# Altium PCB LKS_Motor_0406.PcbDoc (part 3 of 4)
Units mm, origin at the board's own origin, x right, y up, seen from the top; angles counter-clockwise.
Board outline 117 x 10 mm, 2 copper layers (Top Layer, Bottom Layer); 114 components, 77 nets, 340 pads, 169 vias.
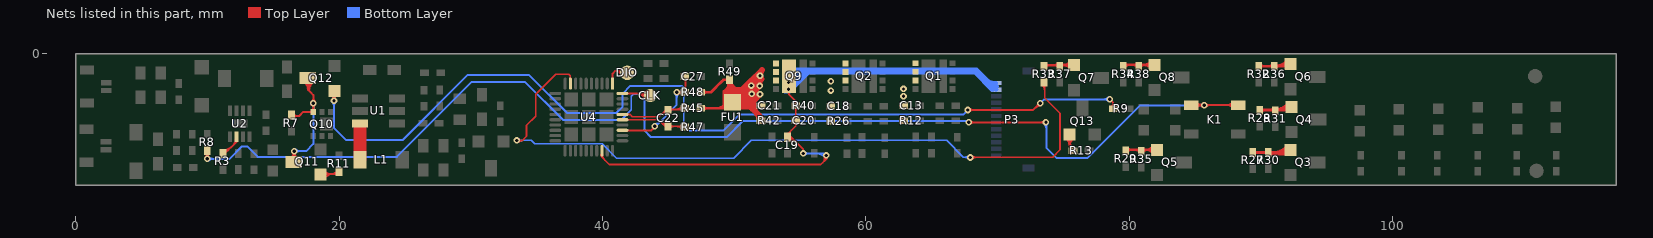
[diagram p3: the nets of this part, all layers, seen from the top]

## Via types
v1: diameter 0.5, hole 0.25, Top Layer to Bottom Layer, 167 vias
v2: diameter 0.7, hole 0.4, Top Layer to Bottom Layer, 2 vias

## Nets (pads, with @x,y where several pads share a name; then routed paths per layer and width w, separated by ;. In a path a pad name is that pad's centre, name@x,y a point inside that pad or via, vN(x,y) a via of type N, cw(c..) or ccw(c..) an arc to the next point about the centre after c; other vN are vias at no path point) (continued)
NetK1_1: K1.1 R8.1 | length 109.1
  Top Layer w0.15: v1(9.982,-7.976) R8.1@9.982,-7.341 ; v1(67.818,-5.207) v1(73.685,-5.207) ; K1.1@84.725,-3.9 K1.1@88.275,-3.9 ; v1@9.982,-7.849 cw(c10.414,-7.849) 10.109,-7.543 ccw(c10.414,-7.849) v1@9.982,-7.849 ; v1@9.982,-7.849 ccw(c9.55,-7.849) 9.856,-7.543 cw(c9.55,-7.849) v1@9.982,-7.849 ; R8.1@9.982,-7.553 cw(c9.56,-7.553) 9.858,-7.852 ccw(c9.56,-7.553) R8.1@9.982,-7.553 ; R8.1@9.982,-7.553 ccw(c10.405,-7.553) 10.106,-7.852 cw(c10.405,-7.553) R8.1@9.982,-7.553 ; 68.24,-5.207 cw(c68.24,-4.785) 67.942,-5.083 ccw(c68.24,-4.785) 68.24,-5.207 ; 68.24,-5.207 ccw(c68.24,-5.629) 67.942,-5.331 cw(c68.24,-5.629) 68.24,-5.207 ; 73.263,-5.207 cw(c73.263,-5.629) 73.562,-5.331 ccw(c73.263,-5.629) 73.263,-5.207 ; 73.263,-5.207 ccw(c73.263,-4.785) 73.562,-5.083 cw(c73.263,-4.785) 73.263,-5.207 ; v1@85.589,-3.9 cw(c85.589,-3.236) 85.12,-3.706 ccw(c85.589,-3.236) v1@85.589,-3.9 ; v1@85.589,-3.9 ccw(c85.589,-4.564) 85.12,-4.095 cw(c85.589,-4.564) v1@85.589,-3.9 ; 87.411,-3.9 cw(c87.411,-4.564) 87.88,-4.095 ccw(c87.411,-4.564) 87.411,-3.9 ; 87.411,-3.9 ccw(c87.411,-3.236) 87.88,-3.706 cw(c87.411,-3.236) 87.411,-3.9 ; K1.1@85.249,-3.9 cw(c85.249,-4.362) 85.576,-4.035 ccw(c85.249,-4.362) K1.1@85.249,-3.9 ; 85.305,-3.9 ccw(c85.305,-3.517) 85.576,-3.788 cw(c85.305,-3.517) 85.305,-3.9 ; v1@85.823,-4.035 cw(c86.15,-4.362) 86.15,-3.9 ccw(c86.15,-4.362) v1@85.823,-4.035 ; v1@85.823,-3.788 ccw(c86.094,-3.517) 86.094,-3.9 cw(c86.094,-3.517) v1@85.823,-3.788
  Bottom Layer w0.15: v1(9.982,-7.976) 11.684,-7.976 12.624,-7.036 13.03,-7.036 13.818,-7.823 24.384,-7.823 30.074,-2.134 34.112,-2.134 37.008,-5.029 41.427,-5.029 42.189,-4.267 42.189,-3.226 42.342,-3.073 43.053,-3.073 43.205,-3.226 43.205,-5.842 ; 43.205,-5.791 43.205,-5.842 ; v1(67.818,-5.207) 67.716,-5.105 50.648,-5.105 49.428,-6.325 43.688,-6.325 43.205,-5.842 ; v1(73.685,-5.207) 73.736,-5.258 73.711,-5.283 73.711,-7.137 74.473,-7.899 76.86,-7.899 80.848,-3.912 v1(85.7,-3.912) ; 10.405,-7.976 cw(c10.405,-7.553) 10.106,-7.852 ccw(c10.405,-7.553) 10.405,-7.976 ; 10.405,-7.976 ccw(c10.405,-8.398) 10.106,-8.099 cw(c10.405,-8.398) 10.405,-7.976 ; 85.277,-3.912 cw(c85.277,-4.334) 85.576,-4.035 ccw(c85.277,-4.334) 85.277,-3.912 ; 85.277,-3.912 ccw(c85.277,-3.489) 85.576,-3.788 cw(c85.277,-3.489) 85.277,-3.912 ; v1@73.562,-5.331 cw(c73.202,-5.691) 73.711,-5.691 ccw(c73.202,-5.691) v1@73.562,-5.331 ; 73.711,-5.568 cw(c74.047,-5.568) 73.809,-5.331 ccw(c74.047,-5.568) 73.711,-5.568
NetL1_1: L1.1 U1.6 | length 30.7
  Top Layer w0.3: L1.1@21.257,-7.998 U1.6@21.257,-5.319 ; U1.6@21.511,-5.293 21.511,-7.972 L1.1@21.59,-8.052 ; L1.1@21.765,-7.947 U1.6@21.765,-5.268 ; L1.1@21.917,-8.074 U1.6@21.917,-5.395 ; L1.1@21.343,-7.654 ccw(c19.956,-6.267) 21.917,-6.267 cw(c19.956,-6.267) L1.1@21.343,-7.654 ; L1.1@21.343,-7.654 ccw(c20.324,-6.635) 21.765,-6.635 cw(c20.324,-6.635) L1.1@21.343,-7.654 ; L1.1@21.343,-7.654 ccw(c20.937,-7.249) 21.511,-7.249 cw(c20.937,-7.249) L1.1@21.343,-7.654 ; L1.1@21.555,-7.866 ccw(c20.68,-6.992) 21.917,-6.992 cw(c20.68,-6.992) L1.1@21.555,-7.866 ; L1.1@21.555,-7.866 ccw(c21.048,-7.36) 21.765,-7.36 cw(c21.048,-7.36) L1.1@21.555,-7.866 ; L1.1@21.838,-7.654 cw(c23.24,-6.252) 21.257,-6.252 ccw(c23.24,-6.252) L1.1@21.838,-7.654 ; L1.1@21.838,-7.654 cw(c22.627,-6.865) 21.511,-6.865 ccw(c22.627,-6.865) L1.1@21.838,-7.654 ; 21.257,-6.976 ccw(c22.516,-6.976) 21.626,-7.866 cw(c22.516,-6.976) 21.257,-6.976 ; 21.257,-5.728 cw(c21.722,-5.728) 21.393,-5.399 ccw(c21.722,-5.728) 21.257,-5.728 ; 21.511,-5.839 cw(c22.133,-5.839) 21.693,-5.399 ccw(c22.133,-5.839) 21.511,-5.839 ; 21.765,-5.951 cw(c22.544,-5.951) 21.993,-5.399 ccw(c22.544,-5.951) 21.765,-5.951 ; U1.6@21.781,-5.399 cw(c21.452,-5.728) 21.917,-5.728 ccw(c21.452,-5.728) U1.6@21.781,-5.399
NetQ3_1: Q3.1 R27.1 R30.1 | length 21.6
  Top Layer w0.2: R27.1@89.383,-7.493 R30.1@90.576,-7.493 91.77,-7.493 ; R30.1@90.602,-7.62 91.237,-7.62 ; Q3.1@91.872,-7.391 91.745,-7.391 ; Q3.1@91.923,-7.62 91.237,-7.62 ; 89.754,-7.493 cw(c89.754,-7.121) 89.491,-7.384 ccw(c89.754,-7.121) 89.754,-7.493 ; 89.754,-7.493 ccw(c89.754,-7.865) 89.491,-7.602 cw(c89.754,-7.865) 89.754,-7.493 ; 90.205,-7.493 cw(c90.205,-7.865) 90.468,-7.602 ccw(c90.205,-7.865) 90.205,-7.493 ; 90.205,-7.493 ccw(c90.205,-7.121) 90.468,-7.384 cw(c90.205,-7.121) 90.205,-7.493 ; 90.948,-7.493 cw(c90.948,-7.121) 90.685,-7.384 ccw(c90.948,-7.121) 90.948,-7.493 ; 90.948,-7.493 ccw(c90.948,-7.865) 90.685,-7.602 cw(c90.948,-7.865) 90.948,-7.493 ; 91.237,-7.62 ccw(c91.237,-6.883) 91.921,-7.157 cw(c91.237,-6.883) 91.237,-7.62 ; 91.237,-7.62 91.465,-7.391 ; 91.465,-7.391 ccw(c91.465,-6.844) 91.942,-7.114 cw(c91.465,-6.844) 91.465,-7.391 ; 91.465,-7.391 91.745,-7.391 ; 91.745,-7.391 cw(c91.745,-7.667) Q3.1@91.966,-7.503 ; 91.745,-7.391 ccw(c91.745,-7.238) Q3.1@91.897,-7.254 ; 91.745,-7.391 cw(c91.745,-7.667) Q3.1@91.966,-7.503 ; 91.745,-7.391 ccw(c91.745,-7.238) Q3.1@91.897,-7.254 ; 91.745,-7.391 cw(c91.745,-7.667) Q3.1@91.966,-7.503 ; 91.745,-7.391 ccw(c91.745,-7.238) Q3.1@91.897,-7.254 ; 91.745,-7.391 cw(c91.745,-7.667) Q3.1@91.966,-7.503 ; 91.745,-7.391 ccw(c91.745,-7.238) Q3.1@91.897,-7.254 ; R30.1@90.685,-7.678 cw(c90.826,-7.818) 90.826,-7.62 ccw(c90.826,-7.818) R30.1@90.685,-7.678 ; R30.1@90.685,-7.46 ccw(c91.071,-7.075) 91.071,-7.62 cw(c91.071,-7.075) R30.1@90.685,-7.46 ; 90.9,-7.493 ccw(c90.9,-5.937) 92,-7.037 cw(c90.9,-5.937) 90.9,-7.493 ; 91.383,-7.493 ccw(c91.383,-6.42) 92.142,-7.179 cw(c91.383,-6.42) 91.383,-7.493 ; 91.532,-7.62 ccw(c91.532,-7.001) 92.107,-7.231 cw(c91.532,-7.001) 91.532,-7.62 ; 91.636,-7.391 cw(c91.636,-7.907) 92,-7.542 ccw(c91.636,-7.907) 91.636,-7.391 ; Q3.1@91.828,-7.62 ccw(c91.828,-7.12) 92.293,-7.306 cw(c91.828,-7.12) Q3.1@91.828,-7.62
NetQ4_1: Q4.1 R28.1 R31.1 | length 11.3
  Top Layer w0.2: R28.1@89.84,-4.267 Q4.1@92.151,-4.267 ; R28.1@90.025,-4.401 cw(c90.349,-4.726) 90.349,-4.267 ccw(c90.349,-4.726) R28.1@90.025,-4.401 ; R28.1@90.025,-4.184 ccw(c90.226,-3.982) 90.226,-4.267 cw(c90.226,-3.982) R28.1@90.025,-4.184 ; 90.677,-4.267 ccw(c90.677,-3.809) 91.001,-4.133 cw(c90.677,-3.809) 90.677,-4.267 ; 90.799,-4.267 cw(c90.799,-4.552) 91.001,-4.351 ccw(c90.799,-4.552) 90.799,-4.267 ; R31.1@90.915,-4.267 ccw(c90.915,-2.624) 92.076,-3.786 cw(c90.915,-2.624) R31.1@90.915,-4.267 ; R31.1@91.219,-4.351 cw(c91.42,-4.552) 91.42,-4.267 ccw(c91.42,-4.552) R31.1@91.219,-4.351 ; R31.1@91.219,-4.133 ccw(c91.543,-3.809) 91.543,-4.267 cw(c91.543,-3.809) R31.1@91.219,-4.133 ; 91.398,-4.267 ccw(c91.398,-3.107) 92.218,-3.927 cw(c91.398,-3.107) 91.398,-4.267 ; Q4.1@91.88,-4.267 ccw(c91.88,-3.59) 92.359,-4.069 cw(c91.88,-3.59) Q4.1@91.88,-4.267
NetQ5_1: Q5.1 R29.1 R35.1 | length 8.6
  Top Layer w0.2: R29.1@79.731,-7.366 79.807,-7.29 Q5.1@82.118,-7.29 ; 80.128,-7.29 cw(c80.128,-6.918) 79.865,-7.181 ccw(c80.128,-6.918) 80.128,-7.29 ; 80.128,-7.29 ccw(c80.128,-7.662) 79.865,-7.399 cw(c80.128,-7.662) 80.128,-7.29 ; 81.256,-7.29 cw(c81.256,-8.152) 81.866,-7.542 ccw(c81.256,-8.152) 81.256,-7.29 ; 81.256,-7.29 ccw(c81.256,-6.427) 81.866,-7.037 cw(c81.256,-6.427) 81.256,-7.29 ; 80.491,-7.29 cw(c80.491,-7.748) 80.816,-7.424 ccw(c80.491,-7.748) 80.491,-7.29 ; 80.614,-7.29 ccw(c80.614,-7.005) 80.816,-7.206 cw(c80.614,-7.005) 80.614,-7.29 ; R35.1@81.033,-7.424 cw(c81.358,-7.748) 81.358,-7.29 ccw(c81.358,-7.748) R35.1@81.033,-7.424 ; R35.1@81.033,-7.206 ccw(c81.235,-7.005) 81.235,-7.29 cw(c81.235,-7.005) R35.1@81.033,-7.206
NetQ6_1: Q6.1 R32.1 R36.1 | length 10.1
  Top Layer w0.2: R32.1@89.84,-0.94 R36.1@91.034,-0.94 ; Q6.1@92.253,-0.787 92.1,-0.94 R36.1@91.034,-0.94 ; 90.212,-0.94 cw(c90.212,-0.568) 89.949,-0.831 ccw(c90.212,-0.568) 90.212,-0.94 ; 90.212,-0.94 ccw(c90.212,-1.312) 89.949,-1.049 cw(c90.212,-1.312) 90.212,-0.94 ; 90.662,-0.94 cw(c90.662,-1.312) 90.925,-1.049 ccw(c90.662,-1.312) 90.662,-0.94 ; 90.662,-0.94 ccw(c90.662,-0.568) 90.925,-0.831 cw(c90.662,-0.568) 90.662,-0.94 ; R36.1@91.034,-0.94 ccw(c91.034,0.416) 91.999,-0.536 cw(c91.034,0.416) R36.1@91.034,-0.94 ; 91.405,-0.94 cw(c91.405,-0.568) 91.142,-0.831 ccw(c91.405,-0.568) 91.405,-0.94 ; 91.405,-0.94 ccw(c91.405,-1.312) 91.142,-1.049 cw(c91.405,-1.312) 91.405,-0.94 ; 91.512,-0.94 ccw(c91.512,-0.056) 92.141,-0.677 cw(c91.512,-0.056) 91.512,-0.94 ; 91.758,-0.94 cw(c91.758,-1.282) 92,-1.04 ccw(c91.758,-1.282) 91.758,-0.94
NetQ7_1: Q7.1 R33.1 R37.1 | length 8.7
  Top Layer w0.2: R33.1@73.558,-0.94 73.635,-0.864 Q7.1@75.997,-0.864 ; 73.905,-0.864 cw(c73.905,-0.492) 73.642,-0.755 ccw(c73.905,-0.492) 73.905,-0.864 ; 73.905,-0.864 ccw(c73.905,-1.235) 73.642,-0.972 cw(c73.905,-1.235) 73.905,-0.864 ; 74.355,-0.864 cw(c74.355,-1.235) 74.618,-0.972 ccw(c74.355,-1.235) 74.355,-0.864 ; 74.355,-0.864 ccw(c74.355,-0.492) 74.618,-0.755 cw(c74.355,-0.492) 74.355,-0.864 ; R37.1@74.957,-0.864 cw(c74.957,-1.726) 75.566,-1.116 ccw(c74.957,-1.726) R37.1@74.957,-0.864 ; R37.1@74.957,-0.864 ccw(c74.957,-0.001) 75.566,-0.611 cw(c74.957,-0.001) R37.1@74.957,-0.864 ; 75.099,-0.864 cw(c75.099,-0.492) 74.836,-0.755 ccw(c75.099,-0.492) 75.099,-0.864 ; 75.099,-0.864 ccw(c75.099,-1.235) 74.836,-0.972 cw(c75.099,-1.235) 75.099,-0.864
NetQ8_1: Q8.1 R34.1 R38.1 | length 8.7
  Top Layer w0.2: R34.1@79.527,-0.94 79.629,-0.838 Q8.1@81.94,-0.838 ; 81.078,-0.838 cw(c81.078,-1.701) 81.688,-1.091 ccw(c81.078,-1.701) 81.078,-0.838 ; 81.078,-0.838 ccw(c81.078,0.024) 81.688,-0.586 cw(c81.078,0.024) 81.078,-0.838 ; R34.1@79.662,-0.972 cw(c79.986,-1.297) 79.986,-0.838 ccw(c79.986,-1.297) R34.1@79.662,-0.972 ; R34.1@79.662,-0.755 ccw(c79.863,-0.553) 79.863,-0.838 cw(c79.863,-0.553) R34.1@79.662,-0.755 ; 80.313,-0.838 cw(c80.313,-1.297) 80.638,-0.972 ccw(c80.313,-1.297) 80.313,-0.838 ; 80.436,-0.838 ccw(c80.436,-0.553) 80.638,-0.755 cw(c80.436,-0.553) 80.436,-0.838 ; R38.1@80.855,-0.972 cw(c81.18,-1.297) 81.18,-0.838 ccw(c81.18,-1.297) R38.1@80.855,-0.972 ; R38.1@80.855,-0.755 ccw(c81.057,-0.553) 81.057,-0.838 cw(c81.057,-0.553) R38.1@80.855,-0.755
NetQ10_3: Q10.3 Q11.3 Q12.3 R7.1 | length 27.5
  Top Layer w0.15: R7.1@16.535,-4.724 16.967,-4.724 17.283,-4.409 Q10.3@17.867,-4.409 ; Q11.3@16.586,-8.153 v1(16.586,-7.391) ; Q12.3@17.371,-2.137 cw(c16.843,-2.718) 17.628,-2.718 ; Q12.3@17.471,-2.026 cw(c17.151,-2.379) 17.628,-2.379 cw(c18.104,-2.379) Q12.3@17.784,-2.026 ; Q12.3@17.535,-2.124 cw(c17.067,-2.593) 17.729,-2.593 ; Q12.3@17.628,-1.854 17.628,-2.718 ; 17.729,-2.772 cw(c18.494,-2.772) Q12.3@18.035,-2.16 ; 17.729,-2.769 Q12.3@17.729,-1.905 ; 17.729,-2.471 cw(c18.269,-2.471) Q12.3@17.945,-2.04 ; Q12.3@17.885,-2.137 ccw(c18.412,-2.718) 17.628,-2.718 ; v1@17.921,-3.625 ccw(c17.622,-3.326) 18.044,-3.326 ccw(c18.467,-3.326) v1@18.168,-3.625 ; Q10.3@18.044,-4.409 v1(18.044,-3.749) 18.044,-3.135 17.843,-2.934 17.628,-2.718 ; Q11.3@16.586,-7.814 cw(c17.009,-7.814) 16.71,-7.515 ccw(c17.009,-7.814) Q11.3@16.586,-7.814 ; Q11.3@16.586,-7.814 ccw(c16.164,-7.814) 16.462,-7.515 cw(c16.164,-7.814) Q11.3@16.586,-7.814 ; v1(16.586,-7.391) cw(c15.954,-7.391) 16.332,-7.898 ccw(c15.954,-7.391) v1(16.586,-7.391) ; v1(16.586,-7.391) ccw(c17.308,-7.391) 16.819,-7.923 cw(c17.308,-7.391) v1(16.586,-7.391) ; 16.815,-4.724 cw(c16.815,-4.292) 16.51,-4.598 ccw(c16.815,-4.292) 16.815,-4.724 ; 16.815,-4.724 ccw(c16.815,-5.157) 16.51,-4.851 cw(c16.815,-5.157) 16.815,-4.724 ; 17.743,-4.409 cw(c17.743,-4.711) 17.956,-4.497 ccw(c17.743,-4.711) 17.743,-4.409 ; 17.743,-4.409 ccw(c17.743,-4.107) 17.956,-4.321 cw(c17.743,-4.107) 17.743,-4.409 ; 18.044,-4.171 cw(c18.467,-4.171) 18.168,-3.873 ccw(c18.467,-4.171) 18.044,-4.171 ; 18.044,-4.171 ccw(c17.622,-4.171) 17.921,-3.873 cw(c17.622,-4.171) 18.044,-4.171 ; 18.044,-4.082 cw(c17.743,-4.082) 17.956,-4.296 ccw(c17.743,-4.082) 18.044,-4.082 ; 18.044,-4.082 ccw(c18.346,-4.082) 18.133,-4.296 cw(c18.346,-4.082) 18.044,-4.082 ; Q11.3@16.422,-8.018 ccw(c16.177,-7.691) 16.586,-7.691 cw(c16.177,-7.691) Q11.3@16.422,-8.018 ; 16.586,-7.733 ccw(c16.994,-7.733) 16.718,-8.033 cw(c16.994,-7.733) 16.586,-7.733
  Bottom Layer w0.15: v1(16.586,-7.391) 17.501,-7.391 18.044,-6.848 v1(18.044,-3.749) ; 17.009,-7.391 cw(c17.009,-6.969) 16.71,-7.268 ccw(c17.009,-6.969) 17.009,-7.391 ; 17.009,-7.391 ccw(c17.009,-7.814) 16.71,-7.515 cw(c17.009,-7.814) 17.009,-7.391 ; 18.044,-4.171 cw(c18.467,-4.171) 18.168,-3.873 ccw(c18.467,-4.171) 18.044,-4.171 ; 18.044,-4.171 ccw(c17.622,-4.171) 17.921,-3.873 cw(c17.622,-4.171) 18.044,-4.171
NetQ11_1: Q11.1 R11.1 | length 8.3
  Top Layer w0.127: Q11.1@18.593,-9.144 R11.1@19.787,-9.144 ; Q11.1@18.781,-9.358 cw(c19.298,-9.875) 19.298,-9.144 ccw(c19.298,-9.875) Q11.1@18.781,-9.358 ; Q11.1@18.781,-8.981 ccw(c19.175,-8.587) 19.175,-9.144 cw(c19.175,-8.587) Q11.1@18.781,-8.981 ; Q11.1@18.871,-9.448 cw(c19.605,-10.181) 19.605,-9.144 ccw(c19.605,-10.181) Q11.1@18.871,-9.448 ; Q11.1@18.871,-8.891 ccw(c19.482,-8.28) 19.482,-9.144 cw(c19.482,-8.28) Q11.1@18.871,-8.891 ; 19.285,-9.144 ccw(c19.285,-8.337) 19.855,-8.908 cw(c19.285,-8.337) 19.285,-9.144 ; 19.591,-9.144 ccw(c19.591,-8.644) 19.945,-8.998 cw(c19.591,-8.644) 19.591,-9.144
NetQ12_1: Q12.1 R9.2 | length 79.6
  Top Layer w0.15: Q12.1@19.406,-3.105 cw(c19.003,-3.558) 19.609,-3.558 cw(c20.073,-3.558) Q12.1@19.846,-3.153 ; v1@19.485,-3.432 ccw(c19.186,-3.134) 19.609,-3.134 ccw(c20.031,-3.134) v1@19.733,-3.432 ; Q12.1@19.558,-2.819 19.609,-2.87 v1(19.609,-3.556) ; 19.609,-3.302 cw(c19.93,-3.302) Q12.1@19.773,-3.022 ; v1(67.742,-4.267) 72.72,-4.267 v1@73.203,-3.785 ; v1(78.537,-3.454) 78.791,-3.708 R9.2@78.791,-4.166 ; 68.164,-4.267 cw(c68.164,-3.845) 67.866,-4.143 ccw(c68.164,-3.845) 68.164,-4.267 ; 68.164,-4.267 ccw(c68.164,-4.69) 67.866,-4.391 cw(c68.164,-4.69) 68.164,-4.267 ; 78.791,-3.733 cw(c78.359,-3.733) 78.664,-4.039 ccw(c78.359,-3.733) 78.791,-3.733 ; 78.791,-3.733 ccw(c79.223,-3.733) 78.917,-4.039 cw(c79.223,-3.733) 78.791,-3.733 ; 72.911,-4.076 cw(c73.254,-4.418) 73.254,-3.934 ccw(c73.254,-4.418) 72.911,-4.076 ; 72.973,-4.015 ccw(c72.717,-3.759) 73.079,-3.759 cw(c72.717,-3.759) 72.973,-4.015
  Bottom Layer w0.15: v1@19.485,-3.68 cw(c19.186,-3.978) 19.609,-3.978 cw(c20.031,-3.978) v1@19.733,-3.68 ; v1(19.609,-3.556) 19.609,-5.613 20.549,-6.553 24.816,-6.553 29.743,-1.626 34.442,-1.626 37.313,-4.496 41.046,-4.496 41.529,-4.013 41.529,-3.023 42.113,-2.438 46.025,-2.438 46.177,-2.591 46.177,-5.385 46.609,-5.817 49.2,-5.817 50.419,-4.597 67.437,-4.597 67.742,-4.293 v1(67.742,-4.267) ; v1(73.254,-3.759) 73.558,-3.454 v1(78.537,-3.454) ; 78.114,-3.454 cw(c78.114,-3.877) 78.413,-3.578 ccw(c78.114,-3.877) 78.114,-3.454 ; 78.114,-3.454 ccw(c78.114,-3.032) 78.413,-3.331 cw(c78.114,-3.032) 78.114,-3.454
NetQ13_1: Q13.1 R13.2 | length 9.6
  Top Layer w0.127: R13.2@75.489,-7.112 Q13.1@75.489,-6.147 ; 75.489,-7.097 cw(c76.439,-7.097) 75.767,-6.425 ccw(c76.439,-7.097) 75.489,-7.097 ; 75.489,-7.097 ccw(c74.538,-7.097) 75.21,-6.425 cw(c74.538,-7.097) 75.489,-7.097 ; 75.489,-6.791 cw(c76.133,-6.791) 75.677,-6.335 ccw(c76.133,-6.791) 75.489,-6.791 ; 75.489,-6.791 ccw(c74.845,-6.791) 75.3,-6.335 cw(c74.845,-6.791) 75.489,-6.791 ; 75.489,-7.09 ccw(c75.943,-7.09) 75.622,-7.411 cw(c75.943,-7.09) 75.489,-7.09 ; 75.489,-6.783 ccw(c76.249,-6.783) 75.711,-7.321 cw(c76.249,-6.783) 75.489,-6.783 ; Q13.1@75.489,-6.477 ccw(c76.556,-6.477) 75.801,-7.231 cw(c76.556,-6.477) Q13.1@75.489,-6.477
NetR3_1: R3.1 U2.6 | length 5.1
  Top Layer w0.15: R3.1@11.176,-7.569 11.328,-7.569 12.196,-6.702 U2.6@12.196,-6.309 ; R3.1@11.176,-7.464 ccw(c11.176,-6.842) 11.616,-7.282 cw(c11.176,-6.842) R3.1@11.176,-7.464 ; R3.1@11.176,-7.314 ccw(c11.176,-6.33) 11.872,-7.026 cw(c11.176,-6.33) R3.1@11.176,-7.314 ; 11.967,-6.931 ccw(c11.595,-6.559) 12.121,-6.559 cw(c11.595,-6.559) 11.967,-6.931
OC: C27.2 R48.2 U4.33 | length 16.2
  Top Layer w0.15: U4.33@41.517,-5.811 42.748,-5.811 43.719,-5.811 43.967,-5.563 43.815,-5.715 ; v1(45.644,-2.921) R48.2@46.457,-2.921 ; R48.2@46.304,-2.972 C27.2@46.304,-1.727 ; v1@45.745,-2.921 cw(c45.745,-3.353) 46.051,-3.048 ccw(c45.745,-3.353) v1@45.745,-2.921 ; v1@45.745,-2.921 ccw(c45.745,-2.489) 46.051,-2.794 cw(c45.745,-2.489) v1@45.745,-2.921 ; R48.2@46.066,-2.921 cw(c46.066,-2.499) 45.768,-2.797 ccw(c46.066,-2.499) R48.2@46.066,-2.921 ; R48.2@46.066,-2.921 ccw(c46.066,-3.343) 45.768,-3.045 cw(c46.066,-3.343) R48.2@46.066,-2.921 ; R48.2@46.203,-2.794 ccw(c45.959,-2.55) 46.304,-2.55 cw(c45.959,-2.55) R48.2@46.203,-2.794 ; C27.2@46.203,-1.854 cw(c45.959,-2.098) 46.304,-2.098 ccw(c45.959,-2.098) C27.2@46.203,-1.854 ; 46.304,-2.428 ccw(c46.823,-2.428) 46.456,-2.794 cw(c46.823,-2.428) 46.304,-2.428 ; 46.304,-2.221 cw(c46.823,-2.221) 46.456,-1.854 ccw(c46.823,-2.221) 46.304,-2.221
  Bottom Layer w0.15: v1@43.967,-5.563 45.644,-3.886 v1(45.644,-2.921) ; 45.644,-3.343 cw(c46.066,-3.343) 45.768,-3.045 ccw(c46.066,-3.343) 45.644,-3.343 ; 45.644,-3.343 ccw(c45.221,-3.343) 45.52,-3.045 cw(c45.221,-3.343) 45.644,-3.343 ; v1@43.967,-5.337 ccw(c43.967,-4.792) 44.353,-5.177 cw(c43.967,-4.792) v1@43.967,-5.337 ; v1@44.142,-5.512 cw(c44.442,-5.512) 44.23,-5.3 ccw(c44.442,-5.512) v1@44.142,-5.512
  other v1: 43.967,-5.512
OPA0_IN: C22.1 R47.2 U4.35 | length 11.7
  Top Layer w0.127: U4.35@41.517,-5.011 44.254,-5.011 C22.1@44.755,-5.512 ; R47.2@46.253,-5.563 46.203,-5.512 C22.1@44.983,-5.512 ; 41.983,-5.011 cw(c41.983,-4.874) 41.887,-4.971 ccw(c41.983,-4.874) 41.983,-5.011 ; 41.983,-5.011 ccw(c41.983,-5.147) 41.887,-5.051 cw(c41.983,-5.147) 41.983,-5.011 ; C22.1@44.755,-5.512 C22.1@44.983,-5.512 ; C22.1@44.755,-5.512 C22.1@44.983,-5.512 ; 45.443,-5.512 cw(c45.443,-5.052) 45.118,-5.377 ccw(c45.443,-5.052) 45.443,-5.512 ; 45.443,-5.512 ccw(c45.443,-5.972) 45.118,-5.647 cw(c45.443,-5.972) 45.443,-5.512 ; 44.406,-5.163 ccw(c44.729,-4.84) 44.909,-5.26 cw(c44.729,-4.84) 44.406,-5.163 ; 44.539,-5.296 ccw(c44.809,-5.026) 44.959,-5.377 cw(c44.809,-5.026) 44.539,-5.296 ; 44.672,-5.429 ccw(c44.888,-5.212) 45.008,-5.494 cw(c44.888,-5.212) 44.672,-5.429 ; 45.595,-5.512 cw(c45.595,-6.145) 46.042,-5.697 ccw(c45.595,-6.145) 45.595,-5.512 ; 45.84,-5.512 ccw(c45.84,-5.225) 46.042,-5.428 cw(c45.84,-5.225) 45.84,-5.512 ; 45.901,-5.512 cw(c45.901,-5.839) 46.132,-5.608 ccw(c45.901,-5.839) 45.901,-5.512
OPA0_IP: C22.2 R45.2 U4.36 | length 10.7
  Top Layer w0.127: U4.36@41.517,-4.611 42.101,-4.611 42.266,-4.775 44.298,-4.775 C22.2@44.831,-4.242 ; 41.983,-4.611 cw(c41.983,-4.474) 41.887,-4.571 ccw(c41.983,-4.474) 41.983,-4.611 ; 41.983,-4.611 ccw(c41.983,-4.747) 41.887,-4.651 cw(c41.983,-4.747) 41.983,-4.611 ; 44.398,-4.675 cw(c44.983,-5.26) 44.983,-4.432 ccw(c44.983,-5.26) 44.398,-4.675 ; 44.615,-4.458 cw(c44.983,-4.827) 44.983,-4.305 ccw(c44.983,-4.827) 44.615,-4.458
  Top Layer w0.15: C22.2@44.831,-4.242 R45.2@46.101,-4.242 ; R45.2@46.443,-4.204 R45.2@46.507,-4.14 ; C22.2@45.11,-4.343 cw(c45.354,-4.587) 45.354,-4.242 ccw(c45.354,-4.587) C22.2@45.11,-4.343 ; C22.2@45.11,-4.09 ccw(c45.477,-3.723) 45.477,-4.242 cw(c45.477,-3.723) C22.2@45.11,-4.09 ; 45.5,-4.242 ccw(c45.5,-3.463) 46.051,-4.014 cw(c45.5,-3.463) 45.5,-4.242 ; 45.862,-4.242 ccw(c45.862,-3.825) 46.157,-4.12 cw(c45.862,-3.825) 45.862,-4.242
PGND: C13.1 C18.1 C21.1 FU1.2 Q1.5 Q1.6 Q1.7 Q2.5 Q2.6 Q2.7 Q9.5 Q9.6 Q9.7 R12.2 R26.2 R42.2 R45.1 R48.1 R49.1 | length 111.1
  Top Layer w0.2: R48.1@47.676,-2.921 48.26,-2.921 49.098,-2.083 ; 47.921,-2.921 cw(c47.921,-2.549) 47.658,-2.812 ccw(c47.921,-2.549) 47.921,-2.921 ; 47.921,-2.921 ccw(c47.921,-3.293) 47.658,-3.03 cw(c47.921,-3.293) 47.921,-2.921
  Top Layer w0.203: R45.1@47.727,-4.14 48.717,-4.14 ; 48.959,-2.222 49.2,-1.981 ; 49.098,-2.083 49.2,-1.981 ; 49.149,-4.14 48.717,-4.14 ; FU1.2@49.276,-4.14 49.225,-4.089 49.225,-2.87 49.708,-2.388 49.708,-2.692 49.657,-2.743 ; 49.363,-2.733 49.555,-2.54 49.555,-1.981 49.2,-1.981 ; 49.886,-2.515 49.886,-2.413 50.521,-3.048 ; 47.917,-4.14 cw(c47.917,-3.772) 47.657,-4.032 ccw(c47.917,-3.772) 47.917,-4.14 ; 47.917,-4.14 ccw(c47.917,-4.508) 47.657,-4.248 cw(c47.917,-4.508) 47.917,-4.14 ; 48.717,-4.14 ccw(c48.717,-3.489) FU1.2@49.359,-3.596 ; 48.717,-4.14 ccw(c48.717,-3.489) FU1.2@49.359,-3.596 ; 48.717,-4.14 ccw(c48.717,-3.489) FU1.2@49.359,-3.596 ; 48.717,-4.14 ccw(c48.717,-3.489) FU1.2@49.359,-3.596 ; 48.717,-4.14 51.359,-4.14 ; 48.957,-4.14 ccw(c48.957,-3.529) FU1.2@49.56,-3.629 ; 48.957,-4.14 ccw(c48.957,-3.529) FU1.2@49.56,-3.629 ; 48.957,-4.14 ccw(c48.957,-3.529) FU1.2@49.56,-3.629 ; 48.957,-4.14 ccw(c48.957,-3.529) FU1.2@49.56,-3.629 ; 49.197,-4.14 ccw(c49.197,-3.569) FU1.2@49.76,-3.662 ; 49.197,-4.14 ccw(c49.197,-3.569) FU1.2@49.76,-3.662 ; 49.197,-4.14 ccw(c49.197,-3.569) FU1.2@49.76,-3.662 ; 49.197,-4.14 ccw(c49.197,-3.569) FU1.2@49.76,-3.662 ; 51.359,-4.14 cw(c51.359,-3.083) 50.38,-3.482 ccw(c51.359,-3.083) 51.359,-4.14 ; 49.431,-2.664 ccw(c48.824,-2.057) 49.682,-2.057 cw(c48.824,-2.057) 49.431,-2.664 ; FU1.2@49.436,-4.14 ccw(c49.436,-3.608) 49.961,-3.695 cw(c49.436,-3.608) FU1.2@49.436,-4.14 ; R49.1@49.727,-2.165 cw(c49.16,-2.732) 49.962,-2.732 ccw(c49.16,-2.732) R49.1@49.727,-2.165 ; R49.1@49.732,-2.17 cw(c49.416,-2.517) 49.886,-2.517 ccw(c49.416,-2.517) R49.1@49.732,-2.17 ; FU1.2@49.815,-3.712 ccw(c50.452,-3.452) 50.452,-4.14 cw(c50.452,-3.452) FU1.2@49.815,-3.712 ; 49.972,-2.499 cw(c49.211,-3.26) 50.122,-3.832 ccw(c49.211,-3.26) 49.972,-2.499 ; FU1.2@50.003,-3.635 ccw(c50.754,-3.329) 50.754,-4.14 cw(c50.754,-3.329) FU1.2@50.003,-3.635 ; 50.152,-2.679 cw(c49.433,-3.399) 50.294,-3.94 ccw(c49.433,-3.399) 50.152,-2.679 ; FU1.2@50.191,-3.558 ccw(c51.057,-3.206) 51.057,-4.14 cw(c51.057,-3.206) FU1.2@50.191,-3.558 ; 50.332,-2.86 cw(c49.654,-3.538) 50.466,-4.048 ccw(c49.654,-3.538) 50.332,-2.86
  Top Layer w0.45: 50.521,-2.743 50.622,-2.743 ; 51.003,-3.785 51.714,-4.496 ; 51.41,-4.191 51.714,-4.496 ; 51.46,-2.743 51.232,-2.743 ; v1@51.486,-3.2 51.486,-3.556 ; v1(51.943,-2.438) v1(51.333,-3.048) ; v1(51.968,-3.073) 51.486,-3.556 ; R42.2@52.043,-5.096 52.043,-4.824 51.714,-4.496 ; C21.1@52.043,-3.953 49.673,-3.953 FU1.2@49.505,-3.785 ; FU1.2@49.505,-3.785 49.505,-2.972 49.835,-3.302 51.079,-3.302 ; FU1.2@49.505,-3.785 50.597,-3.785 ; FU1.2@49.505,-3.785 49.809,-3.48 50.902,-3.48 ; FU1.2@50.176,-3.393 ccw(c51.526,-2.042) 51.526,-3.953 cw(c51.526,-2.042) FU1.2@50.176,-3.393 ; FU1.2@50.176,-3.393 ccw(c51.121,-2.448) 51.121,-3.785 cw(c51.121,-2.448) FU1.2@50.176,-3.393 ; FU1.2@50.185,-3.963 cw(c50.597,-4.349) 50.597,-3.785 ; FU1.2@50.185,-3.963 cw(c50.597,-4.349) 50.597,-3.785 ; FU1.2@50.185,-3.963 cw(c50.597,-4.349) 50.597,-3.785 ; FU1.2@50.185,-3.963 cw(c50.597,-4.349) 50.597,-3.785 ; FU1.2@50.274,-3.553 ccw(c50.597,-3.444) 50.597,-3.785 ; FU1.2@50.274,-3.553 ccw(c50.597,-3.444) 50.597,-3.785 ; FU1.2@50.274,-3.553 ccw(c50.597,-3.444) 50.597,-3.785 ; FU1.2@50.274,-3.553 ccw(c50.597,-3.444) 50.597,-3.785 ; 50.597,-3.785 51.257,-3.785 ; 50.597,-3.785 50.902,-3.48 ; 50.622,-2.743 49.962,-2.743 49.657,-2.743 49.962,-3.048 v1(51.333,-3.048) ; 50.622,-2.743 50.952,-2.743 ; 50.622,-2.743 52.121,-1.245 ; 50.902,-3.48 ccw(c50.902,-4.218) 50.248,-3.874 cw(c50.902,-4.218) 50.902,-3.48 ; 50.902,-3.48 51.079,-3.302 ; 50.902,-3.48 51.257,-3.48 ; 50.952,-2.743 ccw(c50.952,-2.413) 51.283,-2.413 cw(c50.952,-2.413) 50.952,-2.743 ; 50.952,-2.743 cw(c50.952,-3.103) 51.309,-3.052 ccw(c50.952,-3.103) 50.952,-2.743 ; 50.952,-2.743 51.232,-2.743 ; 51.079,-3.302 ccw(c51.079,-4.188) 50.263,-3.843 cw(c51.079,-4.188) 51.079,-3.302 ; 51.079,-3.302 51.257,-3.48 ; 51.079,-3.302 v1(51.333,-3.048) ; 51.232,-2.743 52.07,-1.905 ; 51.257,-3.785 51.486,-3.556 ; 51.257,-3.785 51.257,-3.48 ; 51.257,-3.292 cw(c51.578,-3.292) v1@51.351,-3.066 ; 51.257,-3.292 cw(c51.578,-3.292) v1@51.351,-3.066 ; 51.257,-3.292 cw(c51.578,-3.292) v1@51.351,-3.066 ; 51.257,-3.292 cw(c51.578,-3.292) v1@51.351,-3.066 ; v1(51.333,-3.048) ccw(c51.333,-4.163) 50.275,-3.812 cw(c51.333,-4.163) v1(51.333,-3.048) ; 52.07,-1.905 ccw(c52.41,-2.245) 51.966,-2.429 cw(c52.41,-2.245) 52.07,-1.905 ; 52.121,-1.245 ccw(c52.453,-1.577) 51.993,-1.671 cw(c52.453,-1.577) 52.121,-1.245 ; FU1.2@49.421,-3.529 cw(c50.086,-3.75) 50.086,-3.048 ccw(c50.086,-3.75) FU1.2@49.421,-3.529 ; 49.765,-2.851 cw(c49.226,-3.39) 49.922,-3.699 ccw(c49.226,-3.39) 49.765,-2.851 ; FU1.2@49.848,-3.67 cw(c50.71,-3.957) 50.71,-3.048 ccw(c50.71,-3.957) FU1.2@49.848,-3.67 ; FU1.2@49.849,-3.667 cw(c50.4,-3.901) 50.4,-3.302 ccw(c50.4,-3.901) FU1.2@49.849,-3.667 ; FU1.2@50.176,-3.973 cw(c50.63,-4.428) 50.63,-3.785 ccw(c50.63,-4.428) FU1.2@50.176,-3.973 ; 50.658,-2.707 cw(c51.308,-3.357) 51.308,-2.438 ccw(c51.308,-3.357) 50.658,-2.707 ; 50.66,-3.302 ccw(c50.66,-2.374) 51.316,-3.03 cw(c50.66,-2.374) 50.66,-3.302 ; 51.026,-3.807 ccw(c51.567,-3.266) 51.952,-3.927 cw(c51.567,-3.266) 51.026,-3.807 ; 51.207,-2.768 cw(c51.943,-3.505) 51.943,-2.463 ccw(c51.943,-3.505) 51.207,-2.768 ; v1@51.308,-2.388 ccw(c51.308,-1.714) 51.784,-2.191 cw(c51.308,-1.714) v1@51.308,-2.388 ; v1@51.316,-3.066 cw(c50.905,-3.476) 51.486,-3.476 ccw(c50.905,-3.476) v1@51.316,-3.066 ; v1@51.333,-2.413 cw(c52.252,-2.413) 51.602,-1.763 ccw(c52.252,-2.413) v1@51.333,-2.413 ; v1@51.358,-3.048 cw(c52.4,-3.048) 51.663,-2.312 ccw(c52.4,-3.048) v1@51.358,-3.048 ; 51.449,-1.917 cw(c51.968,-2.436) 51.968,-1.701 ccw(c51.968,-2.436) 51.449,-1.917 ; 51.551,-2.601 cw(c51.737,-2.524) 51.594,-2.381 ccw(c51.737,-2.524) 51.551,-2.601 ; 51.672,-4.453 cw(c51.029,-5.096) 51.938,-5.096 ccw(c51.029,-5.096) 51.672,-4.453 ; 51.692,-2.283 ccw(c51.086,-1.676) 51.943,-1.676 cw(c51.086,-1.676) 51.692,-2.283
  other v1: 62.865,-3.226 57.353,-2.794 62.865,-2.667 51.308,-2.413 57.353,-2.083 51.968,-1.676
RED: R33.2 U4.9 | length 64.8
  Top Layer w0.127: v1(33.503,-6.579) 33.528,-6.604 33.909,-6.604 ; U4.9@37.567,-2.261 37.567,-1.677 37.44,-1.549 36.449,-1.549 34.925,-3.073 34.925,-4.75 34.239,-5.436 34.239,-6.274 33.909,-6.604 ; v1@67.945,-7.849 74.193,-7.849 74.752,-7.29 74.752,-4.521 73.584,-3.353 R33.2@73.584,-2.159 ; 33.909,-6.604 cw(c33.909,-6.295) 33.656,-6.472 ccw(c33.909,-6.295) 33.909,-6.604 ; 37.567,-1.794 cw(c37.431,-1.794) 37.527,-1.891 ccw(c37.431,-1.794) 37.567,-1.794 ; 37.567,-1.794 ccw(c37.703,-1.794) 37.607,-1.891 cw(c37.703,-1.794) 37.567,-1.794 ; v1@33.634,-6.71 cw(c33.892,-6.968) 33.892,-6.604 ccw(c33.892,-6.968) v1@33.634,-6.71 ; v1@68.077,-8.006 cw(c68.457,-8.386) 68.457,-7.849 ccw(c68.457,-8.386) v1@68.077,-8.006 ; v1@68.077,-7.742 ccw(c68.334,-7.485) 68.334,-7.849 cw(c68.334,-7.485) v1@68.077,-7.742 ; R33.2@73.398,-2.37 cw(c72.95,-2.818) 73.584,-2.818 ccw(c72.95,-2.818) R33.2@73.398,-2.37 ; R33.2@73.488,-2.28 cw(c73.257,-2.511) 73.584,-2.511 ccw(c73.257,-2.511) R33.2@73.488,-2.28 ; 73.584,-2.572 cw(c73.87,-2.572) 73.668,-2.37 ccw(c73.87,-2.572) 73.584,-2.572
  Bottom Layer w0.127: v1(33.503,-6.579) 34.595,-6.579 34.849,-6.833 39.98,-6.833 41.072,-7.925 49.962,-7.925 51.308,-6.579 66.142,-6.579 67.412,-7.849 v1@67.945,-7.849 ; 33.953,-6.579 cw(c33.953,-6.128) 33.634,-6.447 ccw(c33.953,-6.128) 33.953,-6.579 ; 33.953,-6.579 ccw(c33.953,-7.029) 33.634,-6.71 cw(c33.953,-7.029) 33.953,-6.579 ; 67.433,-7.849 cw(c67.433,-8.386) 67.813,-8.006 ccw(c67.433,-8.386) 67.433,-7.849 ; 67.556,-7.849 ccw(c67.556,-7.485) 67.813,-7.742 cw(c67.556,-7.485) 67.556,-7.849
  other v1: 67.945,-7.874
SWCLK: CLK.1 U4.40 | length 7.1
  Top Layer w0.15: U4.40@41.517,-3.011 42.545,-3.011 ; CLK.1@43.561,-3.353 43.219,-3.011 42.545,-3.011 ; 42.545,-3.011 cw(c42.545,-3.892) 43.282,-3.408 ccw(c42.545,-3.892) 42.545,-3.011 ; 42.823,-3.011 cw(c42.823,-3.71) 43.407,-3.326 ccw(c42.823,-3.71) 42.823,-3.011 ; 43.008,-3.011 ccw(c43.008,-2.546) 43.337,-2.874 cw(c43.008,-2.546) 43.008,-3.011 ; 43.101,-3.011 cw(c43.101,-3.527) 43.533,-3.244 ccw(c43.101,-3.527) 43.101,-3.011
SWDIO: DIO.1 U4.1 | length 5.2
  Top Layer w0.15: U4.1@40.767,-2.261 40.767,-1.499 40.97,-1.295 ; DIO.1@41.859,-1.524 41.631,-1.295 40.97,-1.295 ; 40.97,-1.295 cw(c40.97,-1.8) 41.441,-1.619 ccw(c40.97,-1.8) 40.97,-1.295 ; 41.106,-1.295 ccw(c41.106,-0.669) 41.549,-1.112 cw(c41.106,-0.669) 41.106,-1.295 ; 41.189,-1.295 cw(c41.189,-1.716) 41.581,-1.565 ccw(c41.189,-1.716) 41.189,-1.295
U: C19.1 C20.1 P3.1 P3.2 Q9.10 R40.2 U4.28 | length 123.4
  Top Layer w0.127: U4.28@39.967,-7.361 39.967,-7.861 40.513,-8.407 56.591,-8.407 56.998,-8.001 v1(56.998,-7.722) ; v1(55.245,-7.569) 55.245,-7.239 54.331,-6.325 ; U4.28@39.927,-7.731 cw(c39.831,-7.827) 39.967,-7.827 ; U4.28@39.927,-7.731 cw(c39.831,-7.827) 39.967,-7.827 ; U4.28@39.927,-7.731 cw(c39.831,-7.827) 39.967,-7.827 ; U4.28@39.927,-7.731 cw(c39.831,-7.827) 39.967,-7.827 ; 39.967,-7.827 cw(c40.103,-7.827) U4.28@40.007,-7.731 ; 39.967,-7.827 cw(c40.103,-7.827) U4.28@40.007,-7.731 ; 39.967,-7.827 cw(c40.103,-7.827) U4.28@40.007,-7.731 ; 39.967,-7.827 cw(c40.103,-7.827) U4.28@40.007,-7.731 ; 54.155,-3.076 cw(c54.346,-3.076) 54.291,-2.894 ccw(c54.346,-3.076) 54.155,-3.076 ; 54.155,-3.076 ccw(c53.965,-3.076) 54.02,-2.894 cw(c53.965,-3.076) 54.155,-3.076 ; 54.155,-3.076 54.685,-3.605 ; 54.155,-3.076 Q9.10@54.155,-1.707 ; Q9.10@54.155,-1.707 cw(c53.704,-1.707) 54.004,-2.045 ccw(c53.704,-1.707) Q9.10@54.155,-1.707 ; 54.331,-6.325 cw(c54.331,-6.215) 54.229,-6.255 ccw(c54.331,-6.215) 54.331,-6.325 ; 54.331,-6.325 ccw(c54.331,-6.434) 54.229,-6.394 cw(c54.331,-6.434) 54.331,-6.325 ; 54.331,-6.325 C19.1@54.051,-6.325 54.051,-6.121 54.356,-5.817 ; 54.356,-5.817 ccw(c54.663,-6.123) 54.238,-6.21 cw(c54.663,-6.123) 54.356,-5.817 ; 54.356,-5.817 54.685,-5.488 ; 54.685,-5.488 cw(c54.994,-5.488) 54.802,-5.245 ccw(c54.994,-5.488) 54.685,-5.488 ; 54.685,-5.488 ccw(c54.376,-5.488) 54.567,-5.245 cw(c54.376,-5.488) 54.685,-5.488 ; 54.685,-5.488 54.685,-5.121 54.685,-3.978 54.685,-3.605 ; 54.685,-4.636 cw(c54.225,-4.636) 54.55,-4.961 ccw(c54.225,-4.636) 54.685,-4.636 ; 54.685,-4.636 ccw(c55.145,-4.636) 54.819,-4.961 cw(c55.145,-4.636) 54.685,-4.636 ; 54.685,-4.412 cw(c55.145,-4.412) 54.819,-4.087 ccw(c55.145,-4.412) 54.685,-4.412 ; 54.685,-4.412 ccw(c54.225,-4.412) 54.55,-4.087 cw(c54.225,-4.412) 54.685,-4.412 ; 54.685,-3.605 cw(c54.463,-3.605) 54.582,-3.792 ccw(c54.463,-3.605) 54.685,-3.605 ; 54.685,-3.605 ccw(c54.906,-3.605) 54.787,-3.792 cw(c54.906,-3.605) 54.685,-3.605 ; U4.28@39.896,-7.691 ccw(c40.139,-7.691) 39.967,-7.862 cw(c40.139,-7.691) U4.28@39.896,-7.691 ; U4.28@40.023,-7.691 ccw(c40.572,-7.691) 40.184,-8.079 cw(c40.572,-7.691) U4.28@40.023,-7.691 ; Q9.10@53.996,-2.561 ccw(c53.609,-2.174) 54.155,-2.174 cw(c53.609,-2.174) Q9.10@53.996,-2.561 ; Q9.10@53.996,-2.316 cw(c53.609,-2.702) 54.155,-2.702 ccw(c53.609,-2.702) Q9.10@53.996,-2.316 ; Q9.10@54.029,-2.851 cw(c53.89,-3.077) 54.155,-3.077 ccw(c53.89,-3.077) Q9.10@54.029,-2.851 ; C19.1@54.051,-6.591 cw(c54.051,-7.91) 54.983,-6.977 ccw(c54.051,-7.91) C19.1@54.051,-6.591 ; C19.1@54.051,-6.464 cw(c54.051,-7.476) 54.767,-6.761 ccw(c54.051,-7.476) C19.1@54.051,-6.464 ; C19.1@54.051,-6.337 cw(c54.051,-7.042) 54.55,-6.544 ccw(c54.051,-7.042) C19.1@54.051,-6.337 ; C19.1@54.051,-6.21 cw(c54.051,-6.609) 54.333,-6.327 ccw(c54.051,-6.609) C19.1@54.051,-6.21 ; C19.1@54.051,-6.058 ccw(c54.051,-5.905) 54.16,-6.013 cw(c54.051,-5.905) C19.1@54.051,-6.058 ; C19.1@54.113,-6.236 cw(c54.386,-6.18) 54.189,-5.983 ccw(c54.386,-6.18) C19.1@54.113,-6.236 ; 54.155,-3.075 cw(c54.51,-3.075) 54.259,-2.824 ccw(c54.51,-3.075) 54.155,-3.075 ; Q9.10@54.155,-2.567 cw(c54.51,-2.567) 54.259,-2.316 ccw(c54.51,-2.567) Q9.10@54.155,-2.567 ; Q9.10@54.155,-2.31 ccw(c54.51,-2.31) 54.259,-2.561 cw(c54.51,-2.31) Q9.10@54.155,-2.31 ; Q9.10@54.155,-1.802 ccw(c54.51,-1.802) 54.259,-2.053 cw(c54.51,-1.802) Q9.10@54.155,-1.802 ; 56.731,-8.268 ccw(c56.423,-7.96) 56.825,-7.793 cw(c56.423,-7.96) 56.731,-8.268 ; 56.865,-8.133 ccw(c56.613,-7.881) 56.943,-7.744 cw(c56.613,-7.881) 56.865,-8.133 ; 57,-7.999 ccw(c56.803,-7.802) 57.06,-7.696 cw(c56.803,-7.802) 57,-7.999
  Bottom Layer w0.127: v1(55.245,-7.569) 56.845,-7.569 v1(56.998,-7.722) ; 55.695,-7.569 cw(c55.695,-7.119) 55.377,-7.437 ccw(c55.695,-7.119) 55.695,-7.569 ; 55.695,-7.569 ccw(c55.695,-8.019) 55.377,-7.701 cw(c55.695,-8.019) 55.695,-7.569 ; 56.179,-7.569 cw(c56.179,-8.54) 56.866,-7.853 ccw(c56.179,-8.54) 56.179,-7.569 ; 56.486,-7.569 cw(c56.486,-8.233) 56.956,-7.764 ccw(c56.486,-8.233) 56.486,-7.569 ; 56.793,-7.569 cw(c56.793,-7.927) 57.045,-7.674 ccw(c56.793,-7.927) 56.793,-7.569
  Bottom Layer w0.3: 53.848,-2.845 55.27,-1.422 55.651,-1.422 ; 54.026,-2.464 v1@54.026,-2.337 ; 55.397,-1.194 54.762,-1.194 53.848,-2.108 ; 65.888,-1.422 65.583,-1.422 ; 65.989,-1.194 65.583,-1.194 ; 67.945,-1.422 68.141,-1.422 ; 67.97,-1.194 67.742,-1.194 ; 68.199,-1.422 67.97,-1.422 ; 68.318,-1.465 P3.2@69.558,-2.705 ; 68.732,-1.6 68.555,-1.422 67.97,-1.422 ; P3.1@69.647,-2.222 69.354,-2.222 68.707,-1.575 ; P3.2@69.854,-2.722 68.326,-1.194 ; P3.2@69.952,-2.722 68.959,-1.729 ; 53.848,-2.108 ccw(c54.387,-2.108) 54.168,-2.601 cw(c54.387,-2.108) 53.848,-2.108 ; 53.848,-2.108 53.848,-2.87 54.204,-2.87 55.651,-1.422 ; v1@54.026,-2.337 ccw(c54.34,-2.337) 54.179,-2.607 cw(c54.34,-2.337) v1@54.026,-2.337 ; v1@54.026,-2.337 55.169,-1.194 65.583,-1.194 ; v1@54.127,-2.084 ccw(c54.127,-0.923) 54.949,-1.744 cw(c54.127,-0.923) v1@54.127,-2.084 ; v1@54.127,-2.084 ccw(c54.127,-1.72) 54.385,-1.978 cw(c54.127,-1.72) v1@54.127,-2.084 ; v1@54.227,-2.692 cw(c54.775,-2.692) 54.388,-2.305 ccw(c54.775,-2.692) v1@54.227,-2.692 ; v1@54.227,-2.692 cw(c55.573,-2.692) 54.621,-1.741 ccw(c55.573,-2.692) v1@54.227,-2.692 ; 55.651,-1.422 65.583,-1.422 ; 65.583,-1.422 67.97,-1.422 ; 65.583,-1.194 67.742,-1.194 ; 67.742,-1.194 68.326,-1.194 ; 68.326,-1.194 68.424,-1.194 68.959,-1.729 ; 68.326,-1.194 68.453,-1.321 68.707,-1.575 ; 68.707,-1.575 68.805,-1.575 68.959,-1.729 ; 69.112,-1.98 ccw(c69.66,-1.432) P3.1@69.66,-2.207 ; 69.112,-1.98 ccw(c69.66,-1.432) P3.1@69.66,-2.207 ; 69.112,-1.98 ccw(c69.66,-1.432) P3.1@69.66,-2.207 ; 69.112,-1.98 ccw(c69.66,-1.432) P3.1@69.66,-2.207 ; P3.2@69.644,-2.722 ccw(c68.903,-2.722) 69.427,-2.197 cw(c68.903,-2.722) P3.2@69.644,-2.722 ; P3.2@69.644,-2.722 ccw(c69.139,-2.722) 69.496,-2.364 cw(c69.139,-2.722) P3.2@69.644,-2.722 ; P3.1@69.66,-2.207 cw(c69.66,-1.668) 69.279,-2.049 ccw(c69.66,-1.668) P3.1@69.66,-2.207 ; 53.848,-2.57 ccw(c54.182,-2.57) 54.046,-2.875 cw(c54.182,-2.57) 53.848,-2.57 ; v1@53.927,-2.692 cw(c54.548,-2.692) 54.109,-2.253 ccw(c54.548,-2.692) v1@53.927,-2.692 ; v1@53.927,-2.184 cw(c54.303,-2.184) 54.037,-1.919 ccw(c54.303,-2.184) v1@53.927,-2.184 ; v1@54.039,-2.654 ccw(c53.829,-2.445) 54.052,-2.25 cw(c53.829,-2.445) v1@54.039,-2.654 ; v1@54.127,-2.592 ccw(c54.127,-1.738) 54.732,-2.342 cw(c54.127,-1.738) v1@54.127,-2.592 ; v1@54.127,-2.384 ccw(c54.127,-1.947) 54.436,-2.256 cw(c54.127,-1.947) v1@54.127,-2.384 ; v1@54.227,-2.184 cw(c55.327,-2.184) 54.55,-1.407 ccw(c55.327,-2.184) v1@54.227,-2.184 ; 54.265,-2.427 ccw(c54.071,-2.233) 54.278,-2.053 cw(c54.071,-2.233) 54.265,-2.427 ; 69.127,-1.995 ccw(c69.699,-1.424) 69.897,-2.207 cw(c69.699,-1.424) 69.127,-1.995 ; 69.488,-2.636 ccw(c69.66,-2.465) 69.66,-2.707 cw(c69.66,-2.465) 69.488,-2.636 ; P3.1@69.501,-2.368 ccw(c69.85,-2.019) 69.971,-2.498 cw(c69.85,-2.019) P3.1@69.501,-2.368 ; P3.2@69.939,-2.709 cw(c69.927,-2.722) 69.944,-2.722 ccw(c69.927,-2.722) P3.2@69.939,-2.709
  other v1: 54.127,-2.692 54.127,-2.184